# EAGLE board Encoder_AS5145B (EAGLE 6.6.0)
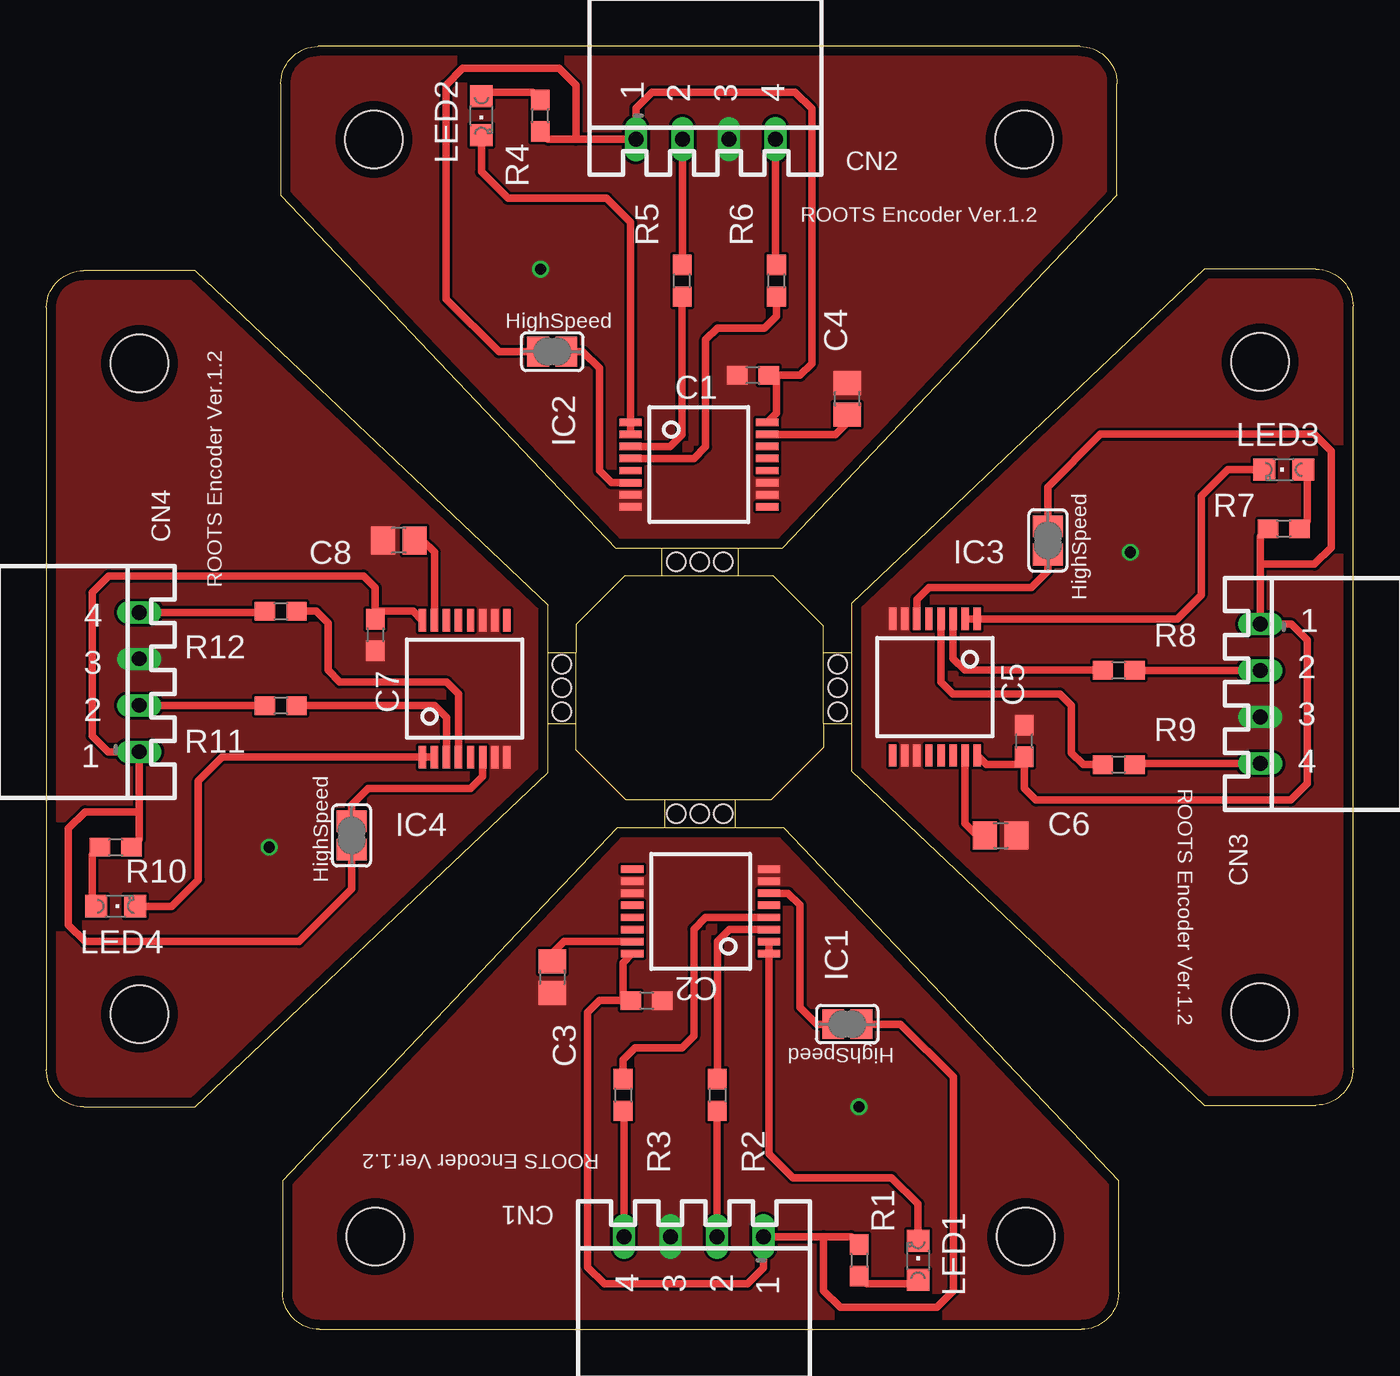
[diagram p0: board, top side]
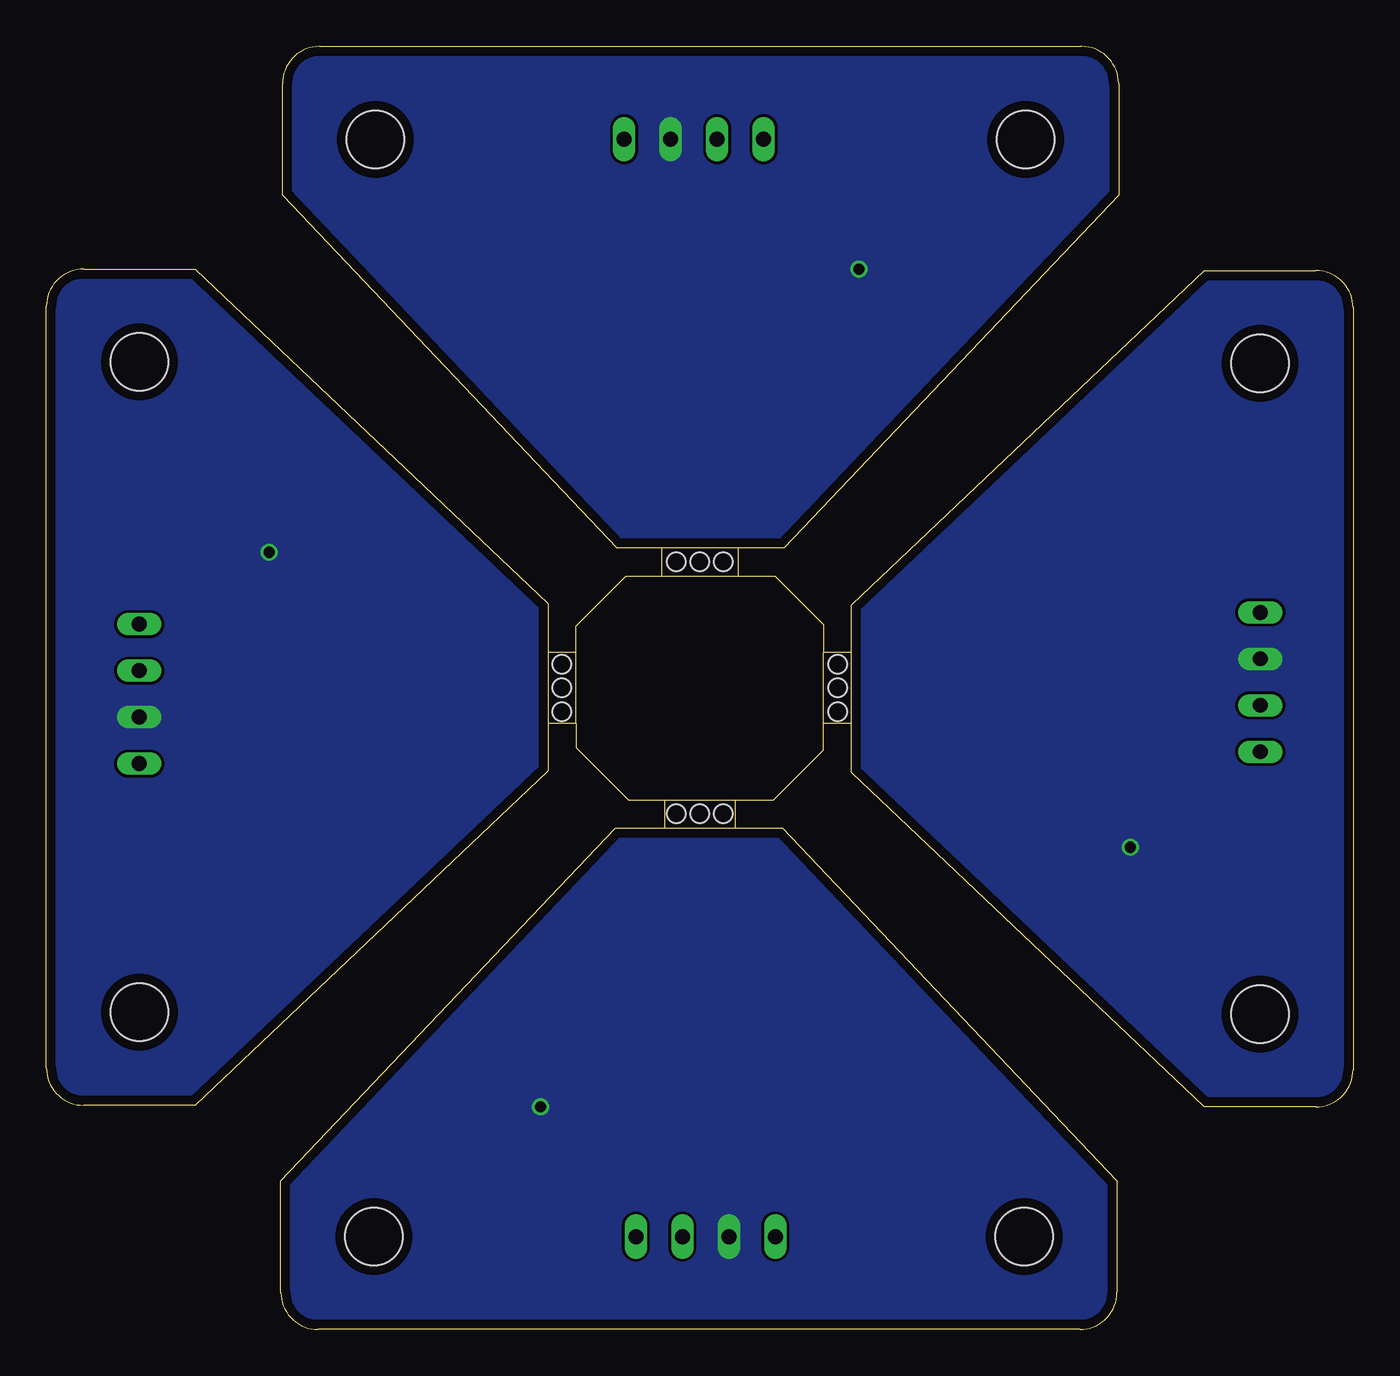
[diagram p1: board, bottom side, seen from below]

Size 70.31 x 69.05 mm. Coordinates in mm from the lower left corner, seen from the top.
Outline: 37.06,27 39.7,27 57.7,8 57.7,2 arc-90 55.7,0 14.7,0 arc-90 12.7,2 12.7,8 30.7,27 33.25,27
Outline: 37.06,27 33.25,27
Outline: 33.09,42.04 30.61,42.04 12.61,61.04 12.61,67.05 arc-90 14.61,69.05 55.62,69.05 arc-90 57.62,67.05 57.62,61.04 39.61,42.04 37.22,42.04
Outline: 33.09,42.04 37.22,42.04
Outline: 43.31,36.43 43.31,39.06 62.31,57.06 68.31,57.06 arc-90 70.31,55.06 70.31,14.07 arc-90 68.31,12.07 62.31,12.07 43.31,30.07 43.31,32.62
Outline: 43.31,36.43 43.31,32.62
Outline: 27,36.43 27,29.98 8,11.98 2,11.98 arc-90 0,13.98 0,54.98 arc-90 2,56.98 8,56.98 27,38.98 27,36.43
Outline: 27,36.43 28.49,36.43
Outline: 41.83,36.43 43.31,36.43
Outline: 41.83,32.62 43.31,32.62
Outline: 28.49,32.62 28.49,36.43
Outline: 41.83,32.62 41.83,36.43
Outline: 27,32.62 28.49,32.62
Outline: 41.83,36.43 41.83,37.86 39.13,40.55 37.22,40.55
Outline: 37.22,40.55 33.09,40.55
Outline: 33.09,40.55 31.11,40.55 28.49,37.94 28.49,36.43
Outline: 41.83,32.62 41.83,31.33 38.98,28.49 37.06,28.49
Outline: 37.06,28.49 33.25,28.49
Outline: 33.25,28.49 31.18,28.49 28.49,31.18 28.49,32.62
Outline: 33.09,42.04 33.09,40.55
Outline: 37.22,42.04 37.22,40.55
Outline: 37.06,28.49 37.06,27
Outline: 33.25,28.49 33.25,27
Copper layers (1*16): Top 0.035mm / dielectric 1.6mm / Bottom 0.035mm
Design rules "Elecrow_2-layer_PCB_eagle_rule": minimum track width 6mil, minimum drill 12mil, track to track 6mil, track to pad 6mil, pad to pad 6mil, via to via 8mil, smd to smd 0mil, copper to edge 20mil, drill to drill 10mil, minimum pad ring 6mil, minimum via ring 6mil, stop-mask expansion 0mil, vias tented up to drill 100mil, thermal gap 10mil
Holes 3.1 mm at 52.7,5 17.7,5 17.61,64.05 52.62,64.05 65.31,52.06 65.31,17.07 5,16.98 5,51.98
Holes 1 mm at 27.75,34.52 27.75,33.25 27.75,35.79 42.57,34.52 42.57,33.25 42.57,35.79 35.16,41.3 36.43,41.3 33.89,41.3 35.16,27.75 36.43,27.75 33.89,27.75
tKeepout: area 49.7,2 to 55.7,8; area 14.7,2 to 20.7,8; area 14.6,61 to 20.6,67; area 49.6,61 to 55.6,67; area 62.3,49.1 to 68.3,55.1; area 62.3,14.1 to 68.3,20.1; area 2,14 to 8,20; area 2,49 to 8,55

## Footprints (pad centres in the part's own frame; a part is rotated, then mirrored left to right if it is on the bottom)
C0603 = smd 1.1 x 1: 1 -0.85,0; 2 0.85,0
C2012 = smd 1.3 x 1.5: 1 -0.85,0; 2 0.85,0
S4B-XH-A = drill 0.8 long: 1 3.75,0; 2 1.25,0; 3 -1.25,0; 4 -3.75,0
SJ = smd 1.168 x 1.6: 1 -0.762,0; 2 0.762,0
SSOP16-WIDE = smd 0.4 x 1.2: 1 -2.275,-3.68; 2 -1.625,-3.68; 3 -0.975,-3.68; 4 -0.325,-3.68; 5 0.325,-3.68; 6 0.975,-3.68; 7 1.625,-3.68; 8 2.275,-3.68; 9 2.275,3.68; 10 1.625,3.68; 11 0.975,3.68; 12 0.325,3.68; 13 -0.325,3.68; 14 -0.975,3.68; 15 -1.625,3.68; 16 -2.275,3.68
CHIPLED_0805 = smd 1.2 x 1.2: A 0,-1.05; C 0,1.05
R1608 = smd 1.1 x 1: 1 -0.85,0; 2 0.85,0

## Placement (x,y rotation side)
C1  0.1u  [C0603]  38.02,51.35 180 top
C2  0.1u  [C0603]  32.3,17.7 0 top
C3  10u  [C2012]  27.22,18.96 270 top
C4  10u  [C2012]  43.09,50.08 90 top
C5  0.1u  [C0603]  52.62,31.67 90 top
C6  10u  [C2012]  51.35,26.59 0 top
C7  0.1u  [C0603]  17.7,37.38 270 top
C8  10u  [C2012]  18.96,42.46 180 top
CN1  4B-XH-AS4B  [S4B-XH-A]  34.84,5 0 top
CN2  4B-XH-AS4B  [S4B-XH-A]  35.47,64.05 180 top
CN3  4B-XH-AS4B  [S4B-XH-A]  65.32,34.2 90 top
CN4  4B-XH-AS4B  [S4B-XH-A]  5,34.84 270 top
HIGH_SPEED  [SJ]  43.09,16.43 180 top
HIGH_SPEED1  [SJ]  27.22,52.62 0 top
HIGH_SPEED2  [SJ]  53.89,42.46 270 top
HIGH_SPEED3  [SJ]  16.43,26.59 90 top
IC1  AS5145  [SSOP16-WIDE]  35.2,22.5 90 top
IC2  AS5145  [SSOP16-WIDE]  35.11,46.54 270 top
IC3  AS5145  [SSOP16-WIDE]  47.81,34.56 180 top
IC4  AS5145  [SSOP16-WIDE]  22.5,34.48 0 top
LED1  [CHIPLED_0805]  46.91,3.73 0 top
LED2  [CHIPLED_0805]  23.41,65.32 180 top
LED3  [CHIPLED_0805]  66.59,46.27 90 top
LED4  [CHIPLED_0805]  3.73,22.78 270 top
R1  1k  [R1608]  43.73,3.73 270 top
R2  100  [R1608]  36.11,12.62 270 top
R3  100  [R1608]  31.03,12.62 270 top
R4  1k  [R1608]  26.58,65.32 90 top
R5  100  [R1608]  34.2,56.43 90 top
R6  100  [R1608]  39.28,56.43 90 top
R7  1k  [R1608]  66.59,43.09 0 top
R8  100  [R1608]  57.7,35.47 0 top
R9  100  [R1608]  57.7,30.39 0 top
R10  1k  [R1608]  3.73,25.95 180 top
R11  100  [R1608]  12.61,33.57 180 top
R12  100  [R1608]  12.61,38.65 180 top

## Library data of the parts
C1 C2 C5 C7 = rcl
C3 C4 C6 C8 = capacitor
CN1-CN4 = Con-JST
HIGH_SPEED HIGH_SPEED1-HIGH_SPEED3 = Jumper
IC1-IC4 = encoder
LED1-LED4 = led
R1-R12 = Registor

## Nets
+5V: C2.1 CN1.1 HIGH_SPEED.1 IC1.16 R1.1
+5V1: C1.1 CN2.1 HIGH_SPEED1.1 IC2.16 R4.1
+5V2: C5.1 CN3.1 HIGH_SPEED2.1 IC3.16 R7.1
+5V3: C7.1 CN4.1 HIGH_SPEED3.1 IC4.16 R10.1
GND: C2.2 C3.2 CN1.3 IC1.7 IC1.8 IC1.10 IC1.11
GND1: C1.2 C4.2 CN2.3 IC2.7 IC2.8 IC2.10 IC2.11
GND2: C5.2 C6.2 CN3.3 IC3.7 IC3.8 IC3.10 IC3.11
GND3: C7.2 C8.2 CN4.3 IC4.7 IC4.8 IC4.10 IC4.11
N$1: LED1.A R1.2
N$2: IC1.4 R3.1
N$3: IC1.3 R2.1
N$5: CN1.2 R2.2
N$6: CN1.4 R3.2
N$7: HIGH_SPEED.2 IC1.6
N$8: C3.1 IC1.15
N$9: IC2.1 IC2.2 LED2.C
N$10: IC1.1 IC1.2 LED1.C
N$11: LED2.A R4.2
N$12: IC2.3 R5.1
N$13: CN2.2 R5.2
N$14: CN2.4 R6.2
N$15: IC2.4 R6.1
N$17: C4.1 IC2.15
N$18: HIGH_SPEED1.2 IC2.6
N$19: IC3.1 IC3.2 LED3.C
N$20: LED3.A R7.2
N$21: IC3.3 R8.1
N$22: CN3.2 R8.2
N$23: CN3.4 R9.2
N$24: IC3.4 R9.1
N$25: C6.1 IC3.15
N$26: HIGH_SPEED2.2 IC3.6
N$27: IC4.1 IC4.2 LED4.C
N$28: LED4.A R10.2
N$29: IC4.3 R11.1
N$30: CN4.2 R11.2
N$31: CN4.4 R12.2
N$32: IC4.4 R12.1
N$33: C8.1 IC4.15
N$34: HIGH_SPEED3.2 IC4.6

## Tracks (layer width: path | path; a pad name or v marks a point on that pad's centre or on a via)
+5V
  Top 0.406: CN1.1 41.83,5 | 41.83,5 43.31,5 R1.1 | IC1.16 31.03,19.73 31.03,17.7 C2.1 29.76,17.7 29.12,17.06 29.12,3.35 30.02,2.45 37.73,2.45 38.59,3.31 CN1.1 | CN1.1 38.65,5 | HIGH_SPEED.1 45.97,16.43 48.81,13.59 48.81,2.08 47.91,1.19 42.72,1.19 41.83,2.08 41.83,5
+5V1
  Top 0.406: CN2.1 28.49,64.05 | 28.49,64.05 27,64.05 R4.1 | IC2.16 39.28,49.31 39.28,51.35 C1.1 40.56,51.35 41.19,51.98 41.19,65.69 40.29,66.59 32.58,66.59 31.72,65.73 CN2.1 | CN2.1 31.67,64.05 | HIGH_SPEED1.1 24.35,52.62 21.5,55.46 21.5,66.96 22.4,67.86 27.59,67.86 28.49,66.96 28.49,64.05
+5V2
  Top 0.406: CN3.1 65.32,41.19 | 65.32,41.19 65.32,42.67 R7.1 | IC3.16 50.58,30.39 52.62,30.39 C5.1 52.62,29.13 53.26,28.49 66.96,28.49 67.86,29.39 67.86,37.1 67,37.95 CN3.1 | CN3.1 65.32,38.01 | HIGH_SPEED2.1 53.89,45.33 56.73,48.17 68.23,48.17 69.13,47.28 69.13,42.09 68.23,41.19 65.32,41.19
+5V3
  Top 0.406: CN4.1 5,27.86 | 5,27.86 5,26.37 R10.1 | IC4.16 19.74,38.65 17.7,38.65 C7.1 17.7,39.92 17.06,40.55 3.35,40.55 2.46,39.66 2.46,31.95 3.31,31.09 CN4.1 | CN4.1 5,31.03 | HIGH_SPEED3.1 16.43,23.71 13.59,20.87 2.08,20.87 1.19,21.77 1.19,26.96 2.08,27.86 5,27.86
GND  (via drill 0.6)
  other vias: 43.73,11.98
  pour Top (no thermals): 58.34,-0.72 58.34,8.45 40.12,27.3 30.5,27.3 11.98,8.14 11.98,-0.72
  pour Bottom (no thermals): 58.34,-0.72 58.34,8.45 40.12,27.3 30.5,27.3 11.98,8.14 11.98,-0.72
GND1  (via drill 0.6)
  other vias: 26.58,57.06
  pour Top (no thermals): 11.98,69.77 11.98,60.6 30.2,41.74 39.81,41.74 58.34,60.9 58.34,69.77
  pour Bottom (no thermals): 11.98,69.77 11.98,60.6 30.2,41.74 39.81,41.74 58.34,60.9 58.34,69.77
GND2  (via drill 0.6)
  other vias: 58.34,41.82
  pour Top (no thermals): 71.03,57.7 61.87,57.7 43.02,39.48 43.02,29.87 62.17,11.35 71.03,11.35
  pour Bottom (no thermals): 71.03,57.7 61.87,57.7 43.02,39.48 43.02,29.87 62.17,11.35 71.03,11.35
GND3  (via drill 0.6)
  other vias: 11.98,25.95
  pour Top (no thermals): -0.72,11.35 8.45,11.35 27.3,29.56 27.3,39.18 8.14,57.7 -0.72,57.7
  pour Bottom (no thermals): -0.72,11.35 8.45,11.35 27.3,29.56 27.3,39.18 8.14,57.7 -0.72,57.7
N$1
  Top 0.406: LED1.A 46.91,2.45 44.15,2.45 R1.2
N$2
  Top 0.406: IC1.4 35.48,22.18 34.84,21.54 34.84,15.79 34.2,15.16 31.67,15.16 31.03,14.52 R3.1
N$3
  Top 0.406: IC1.3 36.75,21.53 36.11,20.89 R2.1
N$5
  Top 0.406: R2.2 36.09,11.77 CN1.2
N$6
  Top 0.406: R3.2 31.09,11.77 CN1.4
N$7
  Top 0.406: HIGH_SPEED.2 41.45,16.43 40.56,17.32 40.56,22.84 39.92,23.48 IC1.6
N$8
  Top 0.406: IC1.15 27.86,20.88 27.22,20.24 C3.1
N$9
  Top 0.406: IC2.2 IC2.1 31.43,59.58 30.14,60.87 24.83,60.87 23.41,62.29 LED2.C
N$10
  Top 0.406: IC1.2 IC1.1 38.88,9.46 40.17,8.17 45.48,8.17 46.91,6.75 LED1.C
N$11
  Top 0.406: LED2.A 23.41,66.59 26.17,66.59 R4.2
N$12
  Top 0.406: IC2.3 33.57,47.52 34.2,48.15 R5.1
N$13
  Top 0.406: R5.2 34.22,57.28 CN2.2
N$14
  Top 0.406: R6.2 39.22,57.28 CN2.4
N$15
  Top 0.406: IC2.4 34.84,46.87 35.47,47.51 35.47,53.25 36.11,53.89 38.65,53.89 39.28,54.52 R6.1
N$17
  Top 0.406: IC2.15 42.46,48.17 43.09,48.8 C4.1
N$18
  Top 0.406: HIGH_SPEED1.2 28.86,52.62 29.76,51.72 29.76,46.21 30.4,45.57 IC2.6
N$19
  Top 0.406: IC3.2 IC3.1 60.85,38.24 62.15,39.54 62.15,44.85 63.56,46.27 LED3.C
N$20
  Top 0.406: LED3.A 67.86,46.27 67.86,43.51 R7.2
N$21
  Top 0.406: IC3.3 48.79,36.11 49.42,35.47 R8.1
N$22
  Top 0.406: R8.2 58.55,35.45 CN3.2
N$23
  Top 0.406: R9.2 58.55,30.46 CN3.4
N$24
  Top 0.406: IC3.4 48.14,34.84 48.78,34.2 54.53,34.2 55.16,33.57 55.16,31.03 55.8,30.39 R9.1
N$25
  Top 0.406: IC3.15 49.44,27.22 50.08,26.59 C6.1
N$26
  Top 0.406: HIGH_SPEED2.2 53.89,40.82 52.99,39.92 47.48,39.92 46.84,39.28 IC3.6
N$27
  Top 0.406: IC4.2 IC4.1 9.46,30.8 8.17,29.51 8.17,24.2 6.75,22.78 LED4.C
N$28
  Top 0.406: LED4.A 2.46,22.78 2.46,25.53 R10.2
N$29
  Top 0.406: IC4.3 21.53,32.93 20.89,33.57 R11.1
N$30
  Top 0.406: R11.2 11.77,33.59 CN4.2
N$31
  Top 0.406: R12.2 11.77,38.59 CN4.4
N$32
  Top 0.406: IC4.4 22.18,34.2 21.54,34.84 15.79,34.84 15.16,35.47 15.16,38.01 14.52,38.65 R12.1
N$33
  Top 0.406: IC4.15 20.87,41.82 20.24,42.46 C8.1
N$34
  Top 0.406: HIGH_SPEED3.2 16.43,28.23 17.32,29.13 22.84,29.13 23.47,29.76 IC4.6

## Text on the board
tPlace: ROOTS Encoder Ver.1.2 | HighSpeed | HighSpeed | ROOTS Encoder Ver.1.2 | ROOTS Encoder Ver.1.2 | HighSpeed | HighSpeed | ROOTS Encoder Ver.1.2